# Altium PCB GEX_Radio.PcbDoc
Units mil, origin at the board's own origin, x right, y up, seen from the top; angles counter-clockwise.
Board outline 1476.38 x 590.55 mil, 2 copper layers (Top Layer, Bottom Layer); 31 components, 34 nets, 142 pads, 60 vias.
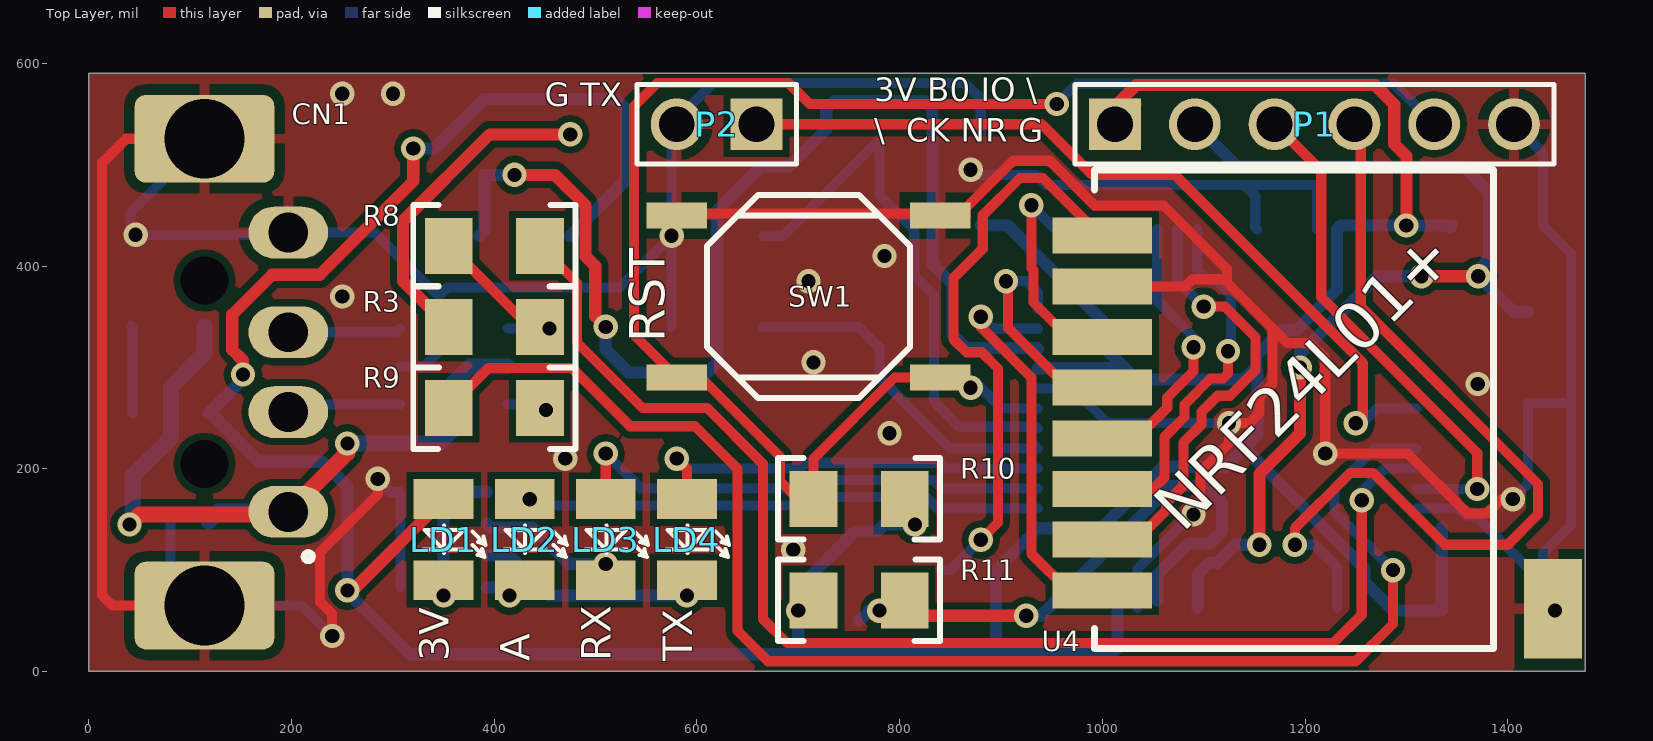
[diagram p0: Top Layer view]
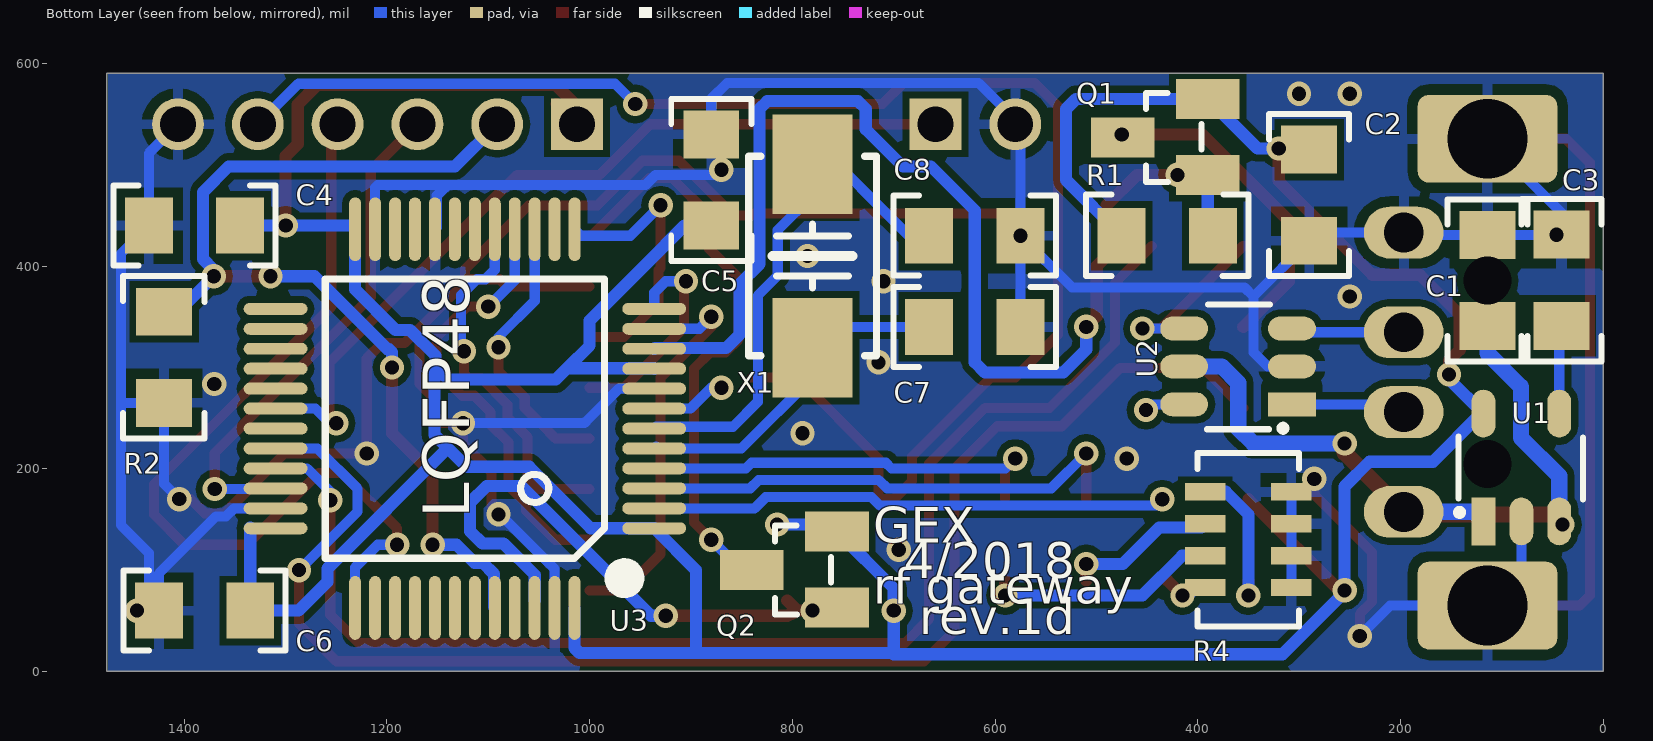
[diagram p1: Bottom Layer view, seen from below]

## Layer stack, top to bottom
Top Solder: solder mask 0.4, Solder Resist, Dk 3.5
Top Layer: signal copper 1.4
Dielectric 1: dielectric 12.6, FR-4, Dk 4.8
Bottom Layer: signal copper 1.4
Bottom Solder: solder mask 0.4, Solder Resist, Dk 3.5

## Board outline
0,0 1476.38,0 1476.38,590.55 0,590.55

## Design rules (kind name [scope] priority, off if disabled: settings)
Clearance Clearance_NoNet [InNet('No Net')] p1: gap=3
Clearance [All] p2: gap=7
PolygonConnect PolygonConnect_GND [All vs InNet('GND') And IsVia] p1: connectstyle=Direct reliefconductorwidth=10 reliefentries=4 polygonreliefangle="90 Angle" airgapwidth=10
PolygonConnect [All] p2: connectstyle=Relief reliefconductorwidth=10 reliefentries=4 polygonreliefangle="90 Angle" airgapwidth=10
RoutingVias [All] p1: holewidth=14 width=24 viastyle="Through Hole" minholewidth=14 minwidth=24 maxholewidth=14 maxwidth=24
SolderMaskExpansion [All] p1: expansion=2
Width ThickSupply [(InNet('3V3') OR InNet('3V3A') OR InNet('5V') OR InNet('VBUS'))] p1: maxlimit=40 minlimit=12 preferedwidth=40
Width [All] p2: maxlimit=100 minlimit=7 preferedwidth=10
30 further rules are at their usual default settings.

## Components (designator, comment, footprint, x,y, rotation, side; value= is the part's Value field where it differs from the comment)
C1 "1u" C0805 114,385.87 r270 bottom
C2 "1u" C0805 290,470 r90 bottom
C3 "10n" C0805 41,386 r270 bottom
C4 "10n" C0805 1390,440 r180 bottom
C5 "100n" C0805 880,485 r270 bottom
C6 "100n" C0805 1380,60 r180 bottom
C7 "12p" C0805 620,340 r0 bottom
C8 "12p" C0805 620,430 r0 bottom
CN1 "USB_A" USB_A -0.17,295.32 r0 top locked
LD1 "Green" LED_SMD 350,130 r270 top
LD2 "Red" LED_SMD 430,130 r270 top
LD3 "Rx" LED_SMD 510,130 r270 top
LD4 "Tx" LED_SMD 590,130 r270 top
P1 "DEBUG_CON" Header_6_2mm 1012.52,540 r0 top
P2 "Header_2" Header_2_2mm 658.74,540 r180 top
Q1 "BSS84" SOT23 390,490 r90 bottom
Q2 "BSS84" SOT23 756,63 r90 bottom
R1 "100k" R0805 430,430 r0 bottom
R2 "100k" R0805 1420,310 r270 bottom
R3 "1k5" R0805 400,340 r180 top
R4 "470" R1206_Array_longpad 350,130 r270 bottom
R8 "22R" R0805 400,420 r180 top
R9 "22R" R0805 400,260 r0 top
R10 "10k" R0805 760,170 r180 top
R11 "100k" R0805 760,70 r180 top
SW1 "SW" SW_TINY_4PAD 710,370 r180 top
U1 "LD3985-3.3" SOT23-5 118,156 r90 bottom
U2 "USBLC6" SOT23-6 314.87,263.6 r0 bottom
U3 "STM32F103C8T6" LQFP48_SHORT 955.83,151.1 r0 bottom locked
U4 "NRF_MINI" NRF_MINI_NOANTLINES 992.13,494.96 r270 top locked
X1 "8MHz" XTAL-SMD-50-32 780,410 r90 bottom

## Footprints (in the part's own frame and the unit in brackets; to place one, negate y for a bottom-side part, rotate by r counter-clockwise, add the part's x,y. Pads: shape width x height; smd on the part's side, far side on the other; paste and mask are expansions set on the pad)
C0805 [mm]
  rect 1.2x1.4 smd: 1(-1.143,0) 2(1.143,0)
  silkscreen extent -2.03,-1 2.03,1, body extent -1,-0.63 1,0.63, height 0.5
Header_2_2mm [mm]
  rect 1.3x1.3 hole 0.9: 1(0,0)
  round 1.3 hole 0.9: 2(2,0)
  silkscreen extent -1,-1 3,1
Header_6_2mm [mm]
  rect 1.3x1.3 hole 0.9: 1(0,0)
  round 1.3 hole 0.9: 2(2,0) 3(4,0) 4(6,0) 5(8,0) 6(10,0)
  silkscreen extent -1,-1 11,1
LED_SMD [mm]
  rect 1x1.5 smd: A(-1.016,0) C(1.016,0)
  silkscreen extent -0.36,-0.51 0.43,1.05, body extent -1.05,-0.45 1.02,0.45, height 0.85
LQFP48_SHORT [mm]
  oval 1.6x0.3 smd: 1(-0.496,0.25) 2(-0.496,-0.25) 3(-0.496,-0.75) 4(-0.496,-1.25) 5(-0.496,-1.75) 6(-0.496,-2.25) 7(-0.496,-2.75) 8(-0.496,-3.25) 9(-0.496,-3.75) 10(-0.496,-4.25) 11(-0.496,-4.75) 12(-0.496,-5.25) 25(8.996,-5.25) 26(8.996,-4.75) 27(8.996,-4.25) 28(8.996,-3.75) 29(8.996,-3.25) 30(8.996,-2.75) 31(8.996,-2.25) 32(8.996,-1.75) 33(8.996,-1.25) 34(8.996,-0.75) 35(8.996,-0.25) 36(8.996,0.25)
  oval 0.3x1.6 smd: 13(1.5,-7.246) 14(2,-7.246) 15(2.5,-7.246) 16(3,-7.246) 17(3.5,-7.246) 18(4,-7.246) 19(4.5,-7.246) 20(5,-7.246) 21(5.5,-7.246) 22(6,-7.246) 23(6.5,-7.246) 24(7,-7.246) 37(7,2.246) 38(6.5,2.246) 39(6,2.246) 40(5.5,2.246) 41(5,2.246) 42(4.5,2.246) 43(4,2.246) 44(3.5,2.246) 45(3,2.246) 46(2.5,2.246) 47(2,2.246) 48(1.5,2.246)
  silkscreen extent 0,-6 7.75,1.75, body extent 0.75,-6 7.75,1, height 1.6
NRF_MINI_NOANTLINES [mm]
  rect 0.9x2.5 smd: 1(1.65,0.2) 2(2.92,0.2) 3(4.19,0.2) 4(5.46,0.2) 5(6.73,0.2) 6(8,0.2) 7(9.27,0.2) 8(10.54,0.2)
  rect 2.5x1.45 smd: 9(11,11.5)
  silkscreen extent 0,0 12,10, body extent 0,0 12,18, height 1.5
R0805 [mm]
  rect 1.2x1.4 smd: 1(-1.143,0) 2(1.143,0)
  silkscreen extent -2.03,-1.03 2.03,1.02, body extent -1,-0.63 1,0.63, height 0.5
R1206_Array_longpad [mil] "1206 4x resistor array"
  rect 17x40 smd: 1(-47.24,-42.48) 2(-47.24,42.48) 3(-15.75,-42.48) 4(-15.75,42.48) 5(15.75,-42.48) 6(15.75,42.48) 7(47.24,-42.48) 8(47.24,42.48)
  silkscreen extent -86,-50 86,50, body extent -63,-31 63,31, height 20
SOT23 [mm]
  rect 1x1.6 smd: 1(0,0) 2(1.905,0) 3(0.94,2.134)
  silkscreen extent -0.18,0.15 2.06,1.55, body extent -0.48,-0.31 2.44,2.24, height 0.94
SOT23-5 [mm]
  rect 1.2x0.6 smd: 1(-0.2,0)
  oval 1.2x0.6 smd: 2(-0.2,-0.95) 3(-0.2,-1.9) 4(2.5,-1.9) 5(2.5,0)
  silkscreen extent -0.05,-2.5 1.92,0.68, body extent -0.24,-2.35 2.55,0.45, height 0.8
SOT23-6 [mm]
  rect 1.2x0.6 smd: 1(-0.2,0)
  oval 1.2x0.6 smd: 2(-0.2,-0.95) 3(-0.2,-1.9) 4(2.5,-1.9) 5(2.5,-0.95) 6(2.5,0)
  silkscreen extent -0.05,-2.5 1.93,0.67, body extent -0.24,-2.35 2.55,0.45, height 0.8
SW_TINY_4PAD [mil]
  rect 60x26 smd: 1(-130,80) 1(130,80) 2(-130,-80) 2(130,-80)
  silkscreen extent -100,-100 100,100, body extent -128,-100 128,100, height 55
USB_A [mm]
  oval 2x1.3 hole 1: 1(5,-3.5) 2(5,-1) 3(5,1) 4(5,3.5)
  rrect25% 3.5x2.2 hole 2: 5(2.9,-5.85) 6(2.9,5.85)
  round 0 hole 1.2 unplated paste+0 mask+0.025: ""(2.9,-2.3) ""(2.9,2.3)
  silkscreen extent 5.4,-4.72 5.6,-4.53, body extent -14,-6 4,6, height 4.5
XTAL-SMD-50-32 [mm]
  rect 2.5x2 smd: 1(-2.3,0) 2(2.3,0)
  silkscreen extent -2.5,-1.6 2.5,1.6, body extent -2.51,-1.6 2.51,1.6, height 1.2

## Part data
C1 C2 C3 C4 C5 C6 C7 C8: library part C
LD1 LD2 LD3 LD4: library part LED
P1: library part "Header 6", "Header, 6-Pin"
P2: "Header, 2-Pin"
Q1 Q2: "P-Channel Enhancement Mode Vertical DMOS FET"
R1 R2 R3 R8 R9 R10 R11: library part R
R4: library part R_ARRAY
SW1: library part SW_SPST_4PAD
U1: library part LD3985
U2: library part USBLC6_ESD
X1: library part XTALL

## Via types
v1: diameter 24, hole 14, Top Layer to Bottom Layer, tented both sides, 60 vias

## Nets (pads, with @x,y where several pads share a name; then routed paths per layer and width w, separated by ;. In a path a pad name is that pad's centre, name@x,y a point inside that pad or via, vN(x,y) a via of type N, cw(c..) or ccw(c..) an arc to the next point about the centre after c; other vN are vias at no path point)
3V3: C2.2 C4.2 C5.2 C6.2 LD1.A P1.1 Q1.2 Q2.2 R1.2 R10.1 R11.2 U1.5 U3.1 U3.9 U3.24 U3.36 U3.48 | length 4218.8
  Top Layer w12: v1(152,293) 152,306.77 141.31,317.46 141.31,351.91 180.91,391.52 227.68,391.52 320,483.84 v1(320,516) ; v1(255,80) 255,75 LD1.A ; P1.1@1032.52,560 P1.1 1012.52,557.52 1033.59,578.59 1268.97,578.59 1288.11,559.45 1288.11,520.55 1300,508.66 v1(1300,440)
  Bottom Layer w12: v1(152,293) 152,288.43 U1.5 120.37,254.43 167.8,207 230.57,207 255,182.57 v1(255,80) 255,78.18 316.18,17 700,17 ; v1(320,516) 341,516 Q1.2 520,565 530,555 530,485 R1.2 ; v1(815,145) 785,145 778,138 Q2.2 700,82 v1(700,60) 700,17 ; C5.2 906.42,440 945,401.42 1000,346.42 1000,321.48 1022.35,299.13 ; U3.9 936.69,299.13 1022.35,299.13 ; U3.48 1014.88,23.06 1010,18.18 895,18.18 ; U3.36@1335,142.04 C6.2 1287.22,60 1258.82,88.4 1258.82,101.59 1140,220.4 ; C4.2@1343,438 C4.2 v1(1300,440) 1235.04,440 U3.24 1231.42,376.82 1191.6,337 1177.4,337 1152,311.6 1152,300.52 1150.22,298.74 ; 700,17 701.18,18.18 895,18.18 ; 895,18.18 895,99.96 U3.1 998.93,141.26 1059.67,202 1121.6,202 1140,220.4 ; 1022.35,299.13 1033.48,288 1139.48,288 1150.22,298.74 ; 1140,220.4 1153,233.4 1153,295.96 1150.22,298.74
BOOT0: P1.2 R2.1 U3.44 | length 988.9
  Top Layer w12: v1(1155,125) 1155,195 1195,235 v1(1195,300) ; v1(1315,390) v1(1371,390)
  Bottom Layer w12: P1.2 1132.85,498.41 1356.16,498.41 1381.62,472.94 1381.62,407.06 1371,396.43 v1(1371,390) 1406,355 R2.1 ; U3.44 1094.4,63.46 1094.4,96.1 1105.48,107.17 1113.64,107.17 1131.47,125 v1(1155,125) ; v1(1195,300) 1195,315 1198,318 1199.47,318 1271.47,390 v1(1315,390)
BYP: C3.2 U1.4 | length 87.5
  Bottom Layer w10: C3.2 43.2,338.8 U1.4
DEBUG_TX: P2.1 U3.30 | length 824.2
  Top Layer w10: P2.1 940.13,540 990.13,490 1071.55,490 1257,304.55 1257,252 v1(1250,245)
  Bottom Layer w10: v1(1250,245) 1256.26,245 1270.63,259.37 U3.30
DM: R9.1 U3.32 | length 1431.9
  Top Layer w10: R9.1 394.56,299.56 476.44,299.56 534.04,241.96 598.04,241.96 640,200 640,40 670,10 1250,10 1286.82,46.82 v1(1286.82,100)
  Bottom Layer w10: v1(1286.82,100) 1229,157.82 1229,180.18 1268.82,220 U3.32
DM_RAW: CN1.2 U2.1 | length 113.5
  Bottom Layer w10: CN1.2 204.33,263.6 U2.1
DP: R8.1 U3.33 | length 1294.1
  Top Layer w10: R8.1 481.6,383.4 481.6,324.58 546.18,260 610,260 665,205 665,51.85 688.85,28 1228,28 1256,56 v1(1256,169)
  Bottom Layer w10: v1(1256,169) 1256,177.54 1278.77,200.31 U3.33
DP_PU: Q1.3 R3.2 | length 323.6
  Top Layer w12: R3.2 310,385 310,444.57 395.43,530 v1(475,530)
DP_RAW: CN1.3 U2.3 | length 111.9
  Bottom Layer w10: CN1.3 303.28,334.69 U2.3
GND: C1.1 C2.1 C3.1 C4.1 C5.1 C6.1 C7.1 C8.1 CN1.4 CN1.5 CN1.6 P1.6 P2.2 R2.2 R4.2 R4.4 R4.6 R4.8 SW1.2 U1.2 U2.2 U3.8 U3.20 U3.23 U3.35 U3.47 U4.2 U4.9 | length 5614.7
  Top Layer w10: CN1.5 23,65 13,75 13,502 36.63,525.63 CN1.6 ; v1(240,35) 240,56.82 228,68.82 228,117.66 285,174.66 v1(285,190) ; SW1.2@580,450 582,452 838,452 840,450 865,450 865,457.23 911.77,504 948.23,504 992.51,459.72 1060.28,459.72 1123,397 1123,387 ; U4.2 1081.82,380 1088.82,387 1123,387 ; v1(1090,155) 1089.04,155 1097,162.96 1097,197 1125,225 v1(1125,245) 1145,245 1155,255 1155,270.96 1168,283.96 1168,338.82 ; v1(1404.94,170.06) 1394,170.06 1379.94,156 1360.06,156 1301.06,215 v1(1220,215) 1220,308.94 1204.94,324 1182.82,324 1168,338.82 ; 1123,387 1123,383.82 1168,338.82
  Bottom Layer w10: U1.2 80.6,105.4 114,72 CN1.5 210,65 v1(240,35) ; CN1.6 41,452.63 C3.1 41.13,430.87 C1.1 194.43,430.87 CN1.4 281.89,433.11 C2.1 345,370 ; v1(285,190) 297.76,177.24 R4.2 R4.4 R4.6 R4.8 ; U2.2 331,301 345,315 345,370 ; C7.1 v1(575,430) ; v1(870,495) 875,490 934.87,490 945,479.87 1140.41,479.87 ; C5.1 880,565 864.24,580.76 616.17,580.76 580,544.59 P2.2 575,535 v1(575,430) ; U3.8 971.16,279.05 1000.11,250.11 1005.22,245 v1(1125,245) ; U3.47 1034.57,101.09 1088.48,155 v1(1090,155) ; U3.20 1150.9,438.16 1150.9,469.38 1140.41,479.87 ; U3.23 1211.73,477.39 1209.25,479.87 1140.41,479.87 ; U3.35 1350.87,160.94 1358.82,153 1368.82,153 1425,96.82 C6.1 v1(1446.77,60) 1435,71.77 1435,116.82 1462.53,144.35 1462.53,265 ; P1.6@1390.59,540 P1.6 1435,511.22 C4.1 1462.53,412.47 1462.53,265 ; v1(1404.94,170.06) 1420,185.12 R2.2 1462.53,265 ; 345,370 354,379 524,379 v1(575,430)
  other v1: 695,120 470,210 790,235 1370.44,283.6 715,305 250,370 710,385 785,410 46,431 250,570 300,570
LED_RX: LD3.A U3.3 | length 492.5
  Top Layer w10: LD3.A v1(510,215)
  Bottom Layer w10: v1(510,215) 544.37,180.63 706.44,180.63 714.81,189 833.23,189 841.6,180.63 U3.3
LED_STATUS: LD2.A U3.2 | length 512
  Bottom Layer w10: v1(435,170) 441.37,163.63 713.48,163.63 721.85,172 826.18,172 837.24,160.94 U3.2
LED_TX: LD4.A U3.4 | length 409.2
  Top Layer w10: v1(580,210) 590,200 LD4.A
  Bottom Layer w10: v1(580,210) 589.69,200.31 702.08,200.31 707.77,206 840.27,206 845.95,200.31 U3.4
N_3V3: Q2.3 U4.1 | length 575.6
  Top Layer w10: v1(880,130) 897,147 897,298.96 880.96,315 865.89,315 853,327.89 853,388 882,417 882,450.18 918.82,487 941.18,487 998.18,430 U4.1
  Bottom Layer w10: Q2.3 850,100 v1(880,130)
N_CE: U3.13 U4.3 | length 278.8
  Top Layer w10: v1(930,460) 930,398.18 932,396.18 932,364.1 966.1,330 U4.3
  Bottom Layer w10: v1(930,460) 960,430 1008.5,430 U3.13
N_IRQ: U3.11 U4.8 | length 400.8
  Top Layer w10: v1(880,350) 880,340 930,290 930,116.1 966.1,80 U4.8
  Bottom Layer w10: v1(880,350) 891.89,338.11 U3.11
N_MISO: U3.16 U4.7 | length 440.2
  Top Layer w10: U4.7 1033.9,130 1063,159.1 1063,166.18 1080,183.18 1080,225.96 1098,243.96 1098,256.18 1113.82,272 1126.04,272 1151,296.96 1151,330 1121,360 v1(1100,360)
  Bottom Layer w10: U3.16 1073.94,386.06 v1(1100,360)
N_MOSI: U3.17 U4.6 | length 364.1
  Top Layer w10: U4.6 1050,180 1061.21,191.21 1061.21,231.21 1081,251 1081,263.23 1106.77,289 1119,289 1124,294 v1(1124,316)
  Bottom Layer w10: U3.17 1093.62,396.38 1103,387 1111.18,387 1127,371.18 1127,319 v1(1124,316)
N_NSS: U3.12 U4.4 | length 216.1
  Top Layer w10: v1(905,385) 907,383 907,339.1 966.1,280 U4.4
  Bottom Layer w10: v1(905,385) 925,385 936.3,373.7 U3.12
N_RESET: Q2.1 R11.1 U3.46 | length 573.7
  Top Layer w12: v1(780,60) R11.1@793.33,60 ; R11.1 795,60 R11.1@793.33,60 ; v1(925,55) 805,55 799.57,57.33 R11.1@793.33,60
  Bottom Layer w12: Q2.1@760,50 770,60 v1(780,60) ; v1(925,55) 939.54,55 1067.54,183 1101.6,183 1118,166.6 1118,138.4 1105.77,126.17 1085.11,126.17 1054.25,95.32 U3.46@1054.25,70.23
N_SCK: U3.15 U4.5 | length 278.4
  Top Layer w10: U4.5 1033.9,230 1039,235.1 1039,235.27 1054.02,250.28 1054.18,250.28 1064,260.1 1064,270.27 1090,296.27 v1(1090,320)
  Bottom Layer w10: U3.15 1054.25,365.75 1090,330 v1(1090,320)
NetLD1_C: LD1.C R4.1 | length 146.7
  Top Layer w12: v1(350,75) LD1.C
  Bottom Layer w12: v1(350,75) 350,155 372.24,177.24 R4.1
NetLD2_C: LD2.C R4.7 | length 46.9
  Top Layer w12: v1(415,75) LD2.C
  Bottom Layer w12: R4.7 402.24,82.76 410,75 v1(415,75)
NetLD3_C: LD3.C R4.3 | length 150
  Top Layer w12: LD3.C v1(510,106)
  Bottom Layer w12: R4.3 396.23,142 438,142 474,106 v1(510,106)
NetLD4_C: LD4.C R4.5 | length 228.8
  Top Layer w12: v1(590,75) LD4.C
  Bottom Layer w12: R4.5 415.35,114.25 454.6,75 v1(590,75)
NetR3_1: R3.1 R8.2 U2.4 | length 175.3
  Top Layer w10: R8.2 436.6,338.4 v1(454.6,338.4) R3.1@455,338
  Bottom Layer w10: U2.4 v1(454.6,338.4)
NetR9_2: R9.2 U2.6 | length 47.8
  Top Layer w10: R9.2 447,258 v1(451,258) R9.2@452,258
  Bottom Layer w10: U2.6 445.4,263.6 v1(451,258)
NRST: P1.5 R10.2 SW1.1 U3.7 | length 1589.4
  Top Layer w10: SW1.1@840,290 795,290 715,210 R10.2 700,170 682,188 682,212.04 604.04,290 580,290 538,332 538,558 560.59,580.59 690.54,580.59 711.13,560 v1(955,560)
  Bottom Layer w10: v1(870,280) 880,280 900.63,259.37 U3.7 ; v1(955,560) 975,580 1287.48,580 P1.5
OSC_IN: C7.2 U3.5 X1.1 | length 340.6
  Bottom Layer w10: C7.2 759.45,340 X1.1 780,290.31 850.31,220 U3.5 U3.5@934.52,221.78
OSC_OUT: C8.2 U3.6 X1.2 | length 548.9
  Bottom Layer w10: C8.2 685,430 780,525 X1.2 780,470 814.37,435.63 814.37,390.63 834,371 834,266 858.54,241.46 934.52,241.46 U3.6
RENUM: Q1.1 R1.1 U3.10 | length 1191.4
  Top Layer w12: v1(420,490) 460,490 490,460 490,409.6 499.6,400 499.6,350.4 v1(510,340)
  Bottom Layer w12: R1.1 390,435 Q1.1 v1(420,490) ; v1(510,340) 510,317.73 532.73,295 610,295 620,305 620,455 663.41,498.41 690.96,498.41 727.63,535.08 727.63,555.15 735.25,562.76 824.75,562.76 832.37,555.15 832.37,402.09 852,382.46 852,332.54 865.34,319.2 935.52,319.2 U3.10
SWCLK: P1.4 U3.37 | length 871.5
  Top Layer w10: v1(1190,125) 1190,141.18 1244.82,196 1267.18,196 1338.18,125 1400,125 1430,155 1430,185 1255,360 1255,533.74 P1.4
  Bottom Layer w10: v1(1190,125) 1209.14,125 1231.42,102.72 U3.37
SWIO: P1.3 U3.34 | length 503.1
  Top Layer w10: P1.3 1216,494 1216,369.6 1370,215.6 v1(1370,180)
  Bottom Layer w10: U3.34 1310.63,180 v1(1370,180)
VBUS: C1.2 CN1.1 U1.1 U1.3 U2.5 | length 778.7
  Top Layer w16: v1(40,145) 50,155 194.16,155 255,215.84 v1(255,225)
  Bottom Layer w16: v1(40,145) 43.2,148.2 43.2,192.82 81,230.63 81,281 114,314 C1.2 ; U1.1 127.39,157.52 CN1.1 ; v1(255,225) 345.29,225 359.94,239.65 359.94,284.64 376.3,301 U2.5
pads on no net: CN1. U3.14 U3.18 U3.19 U3.21 U3.22 U3.25 U3.26 U3.27 U3.28 U3.29 U3.31 U3.38 U3.39 U3.40 U3.41 U3.42 U3.43 U3.45

## Polygon pours and split planes (outlines as drawn)
GND on Top Layer "GND_TOP" (solid, remove dead copper, pour order 0): 0,590 0,0 1475,0 1475,590
GND on Bottom Layer "GND_BOT" (solid, remove dead copper, pour order 2): 0,590 0,0 1475,0 1475,590

## Silkscreen, mask and mechanical layers (free items; w line width, h text height)
Top Overlay:
  text "G TX" at 450,550 h40
  text "3V B0 IO \ / \  CK NR G" at 775,515 h40
  text "RST" at 580,325 h60 r90
  text "NRF24L01+" at 1090,125 h80 r45
  text "3V" at 365,10 h50 r90
  text "A" at 445,10 h50 r90
  text "RX" at 525,10 h50 r90
  text "TX" at 605,10 h50 r90
Bottom Overlay:
  text "4/2018" at 690,80 h60
  text "GEX / rf gateway" at 720,55 h60
  text "rev.1d" at 675,25 h60
Mechanical 1:
  lines w5: 0,0 0,590 1476,590 1476,0 0,0

## Text inside footprints (layer, text, board x,y; h text height)
U3: Bottom Overlay "LQFP48" at 1103.47,151.1 h78.74 r270